# EAGLE board LilyPad-SimplePower-Panel-v20 (EAGLE 6.6.0), part 1 of 2
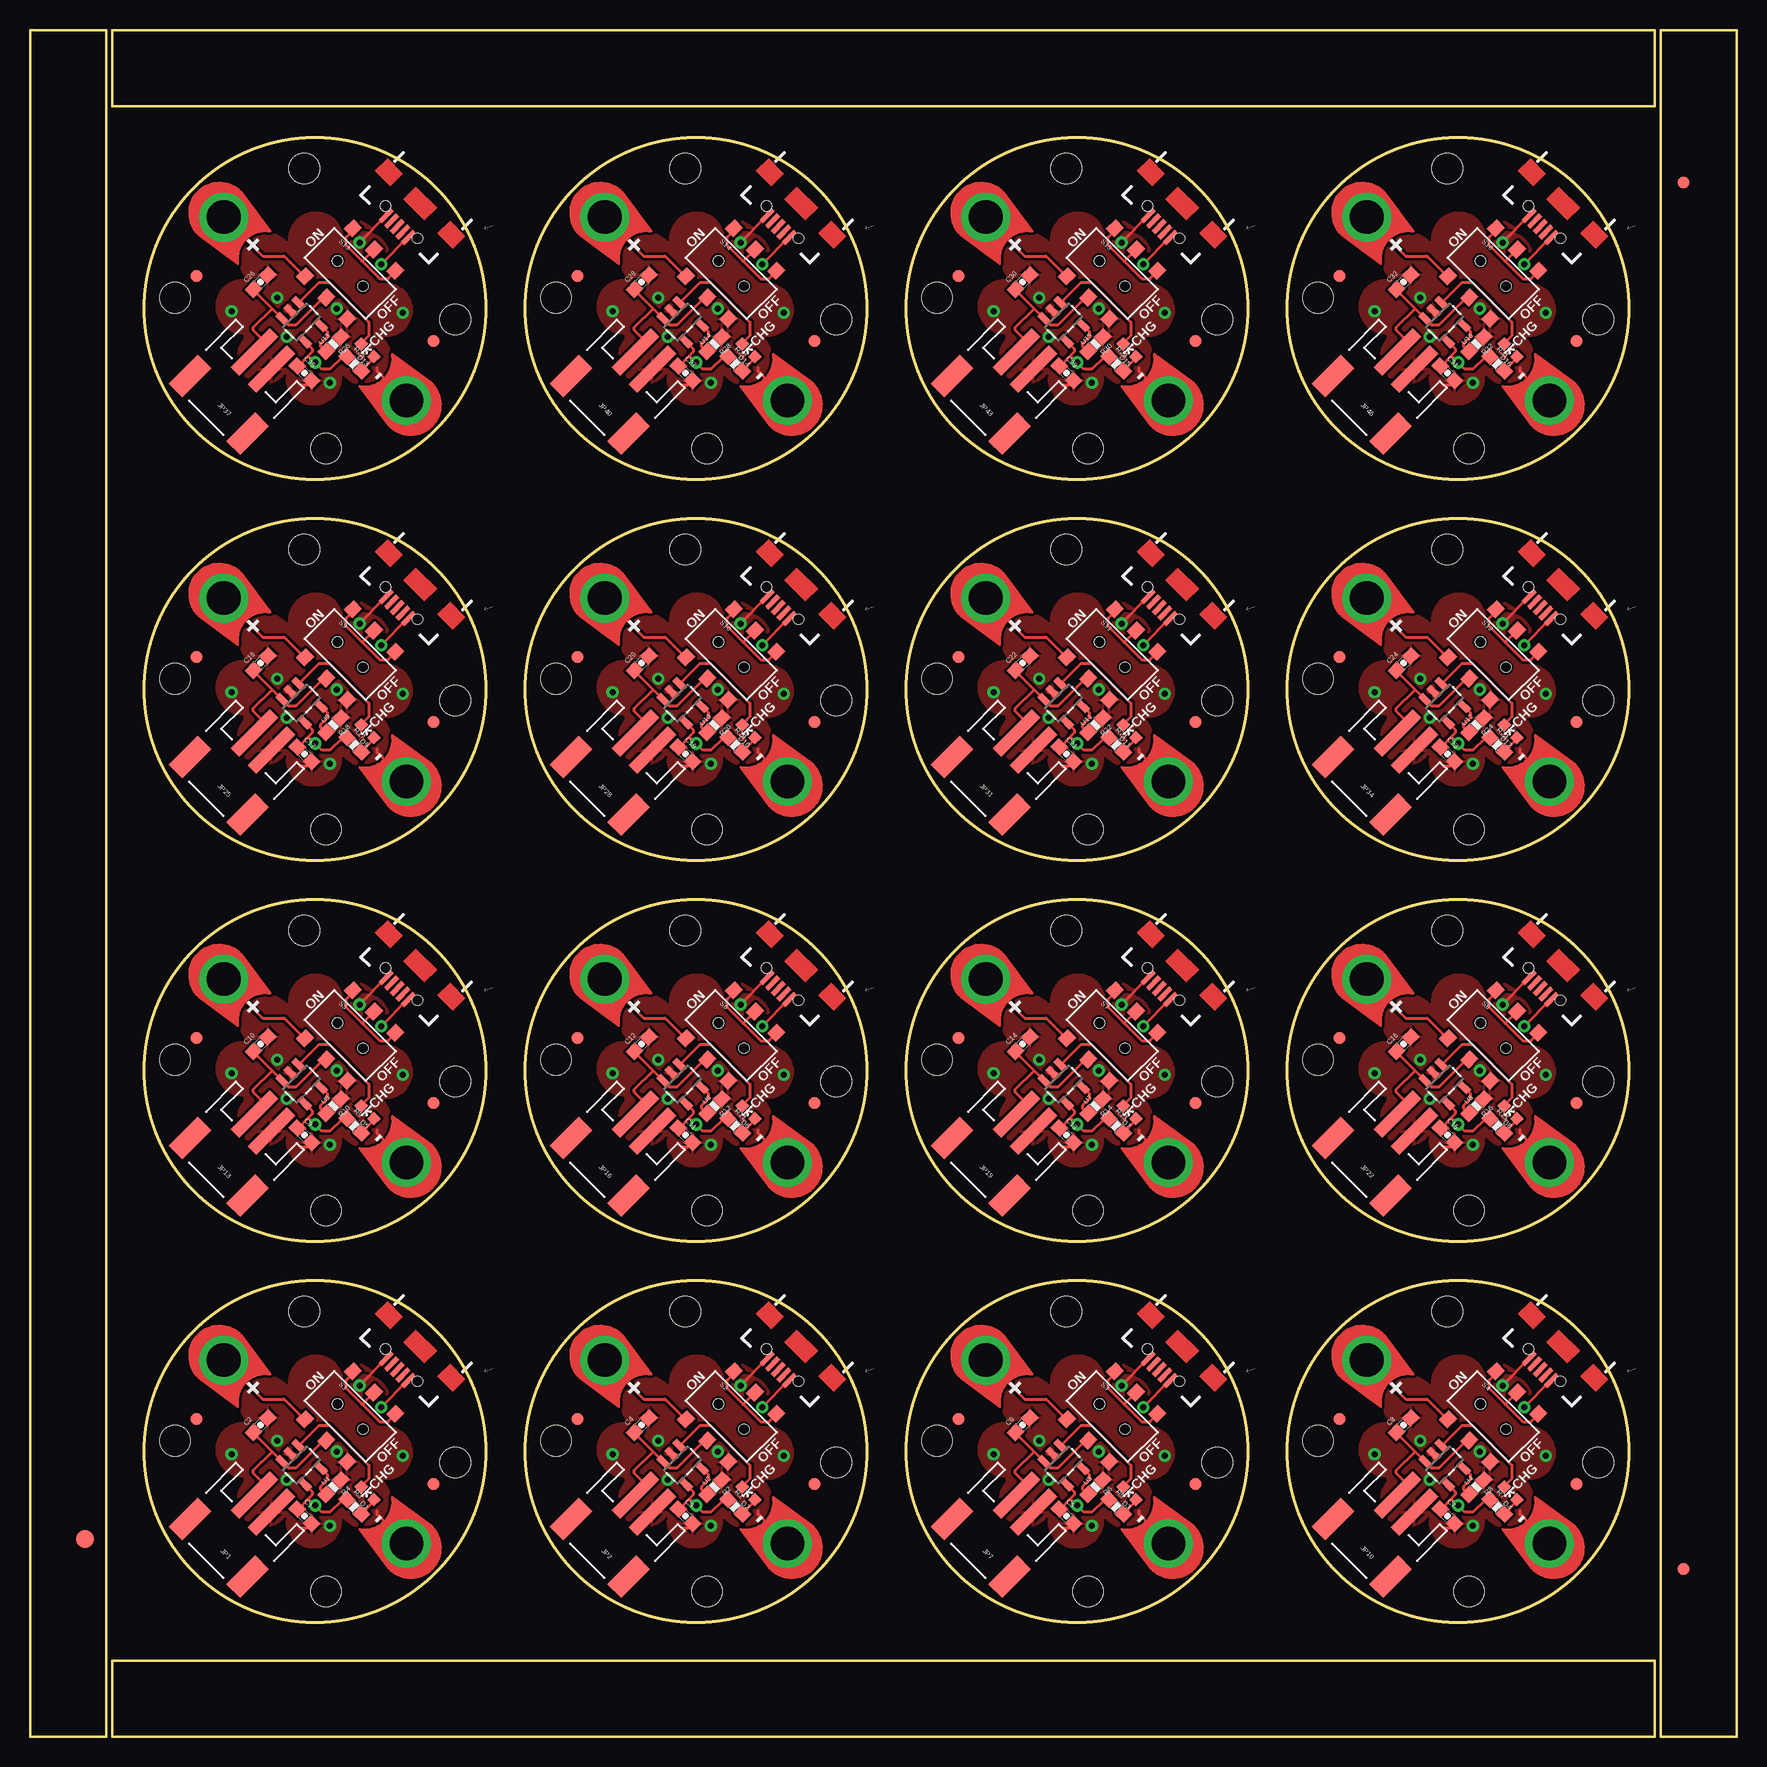
[diagram p0: board, top side]
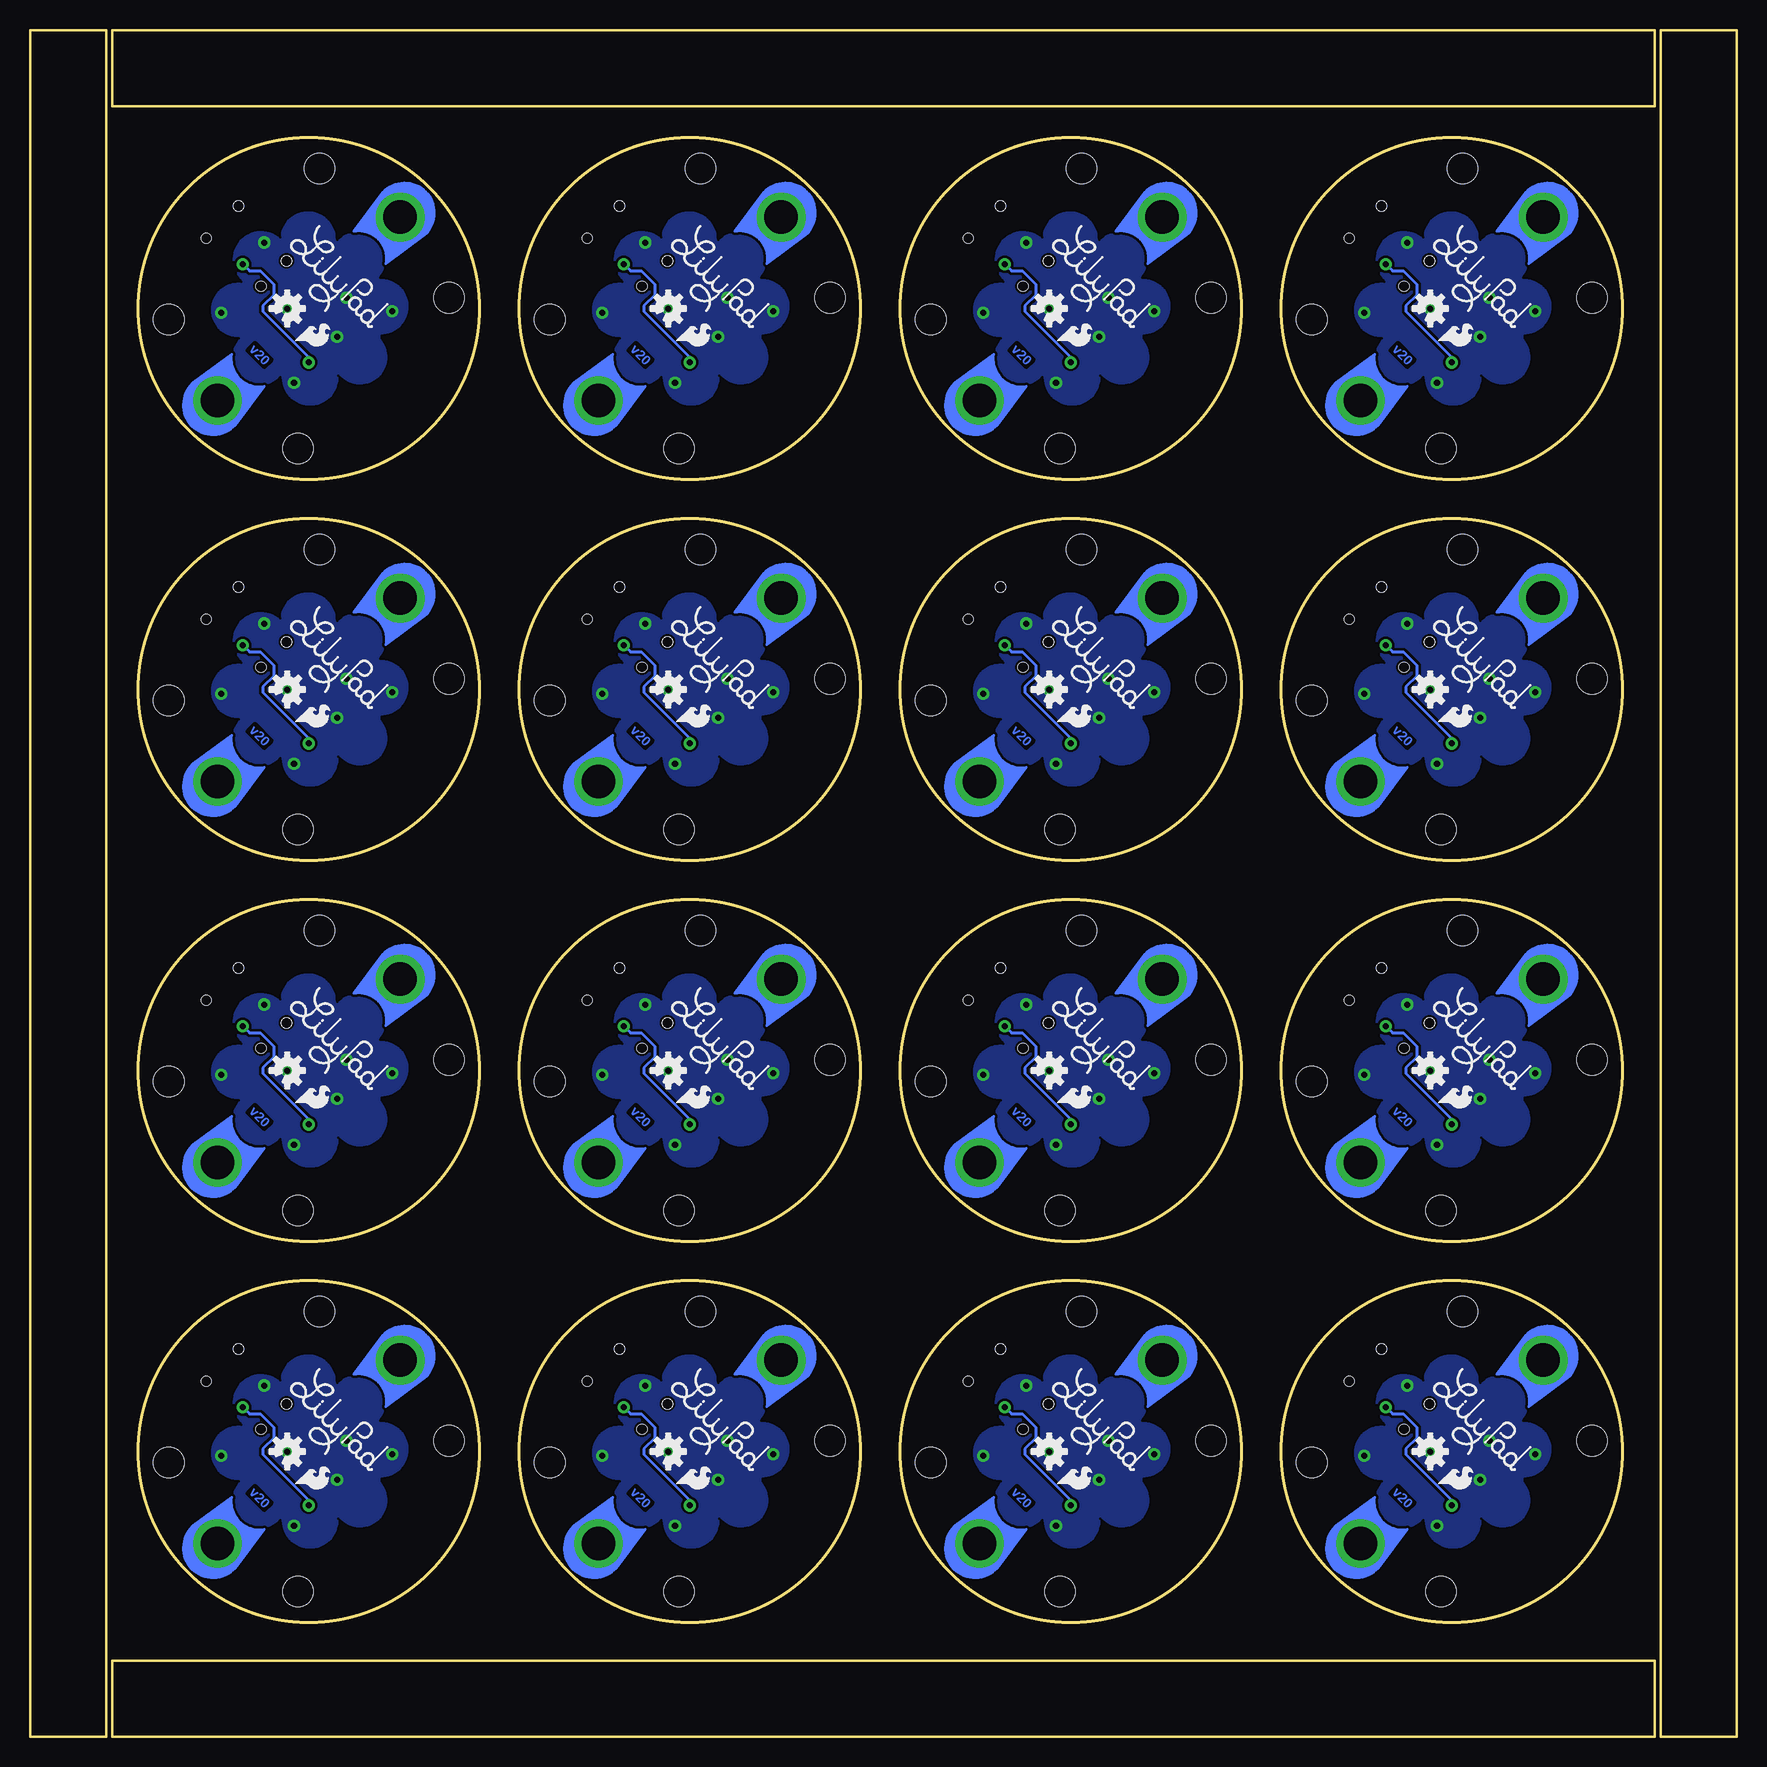
[diagram p1: board, bottom side, seen from below]

Size 142.24 x 142.24 mm. Coordinates in mm from the lower left corner, seen from the top.
Outline: 6.35,0 6.35,142.24 0,142.24 0,0 6.35,0
Outline: 6.86,0 135.38,0 135.38,6.35 6.86,6.35 6.86,0
Outline: 142.24,0 142.24,142.24 135.89,142.24 135.89,0 142.24,0
Outline: 135.38,142.24 6.86,142.24 6.86,135.89 135.38,135.89 135.38,142.24
Outline: circle at 23.76,23.78 radius 14.22
Outline: circle at 55.51,23.78 radius 14.22
Outline: circle at 87.26,23.78 radius 14.22
Outline: circle at 119.01,23.78 radius 14.22
Outline: circle at 23.76,55.53 radius 14.22
Outline: circle at 55.51,55.53 radius 14.22
Outline: circle at 87.26,55.53 radius 14.22
Outline: circle at 119.01,55.53 radius 14.22
Outline: circle at 23.76,87.28 radius 14.22
Outline: circle at 55.51,87.28 radius 14.22
Outline: circle at 87.26,87.28 radius 14.22
Outline: circle at 119.01,87.28 radius 14.22
Outline: circle at 23.76,119.03 radius 14.22
Outline: circle at 55.51,119.03 radius 14.22
Outline: circle at 87.26,119.03 radius 14.22
Outline: circle at 119.01,119.03 radius 14.22
Copper layers (1*16): Top 0.035mm / dielectric 1.5mm / Bottom 0.035mm
Design rules "SparkFun-2-layer": minimum track width 7mil, minimum drill 15mil, track to track 8mil, track to pad 8mil, pad to pad 8mil, via to via 8mil, smd to smd 8mil, copper to edge 8mil, drill to drill 8mil, minimum pad ring 12mil, minimum via ring 10mil, stop-mask expansion 4mil, vias tented up to drill 20mil, thermal gap 10mil
tRestrict: area 12.4,12.4 to 35.1,35.1; area 44.2,12.4 to 66.8,35.1; area 75.9,12.4 to 98.6,35.1; area 107.7,12.4 to 130.3,35.1; area 12.4,44.2 to 35.1,66.9; area 44.2,44.2 to 66.8,66.9; area 75.9,44.2 to 98.6,66.9; area 107.7,44.2 to 130.3,66.9; area 12.4,75.9 to 35.1,98.6; area 44.2,75.9 to 66.8,98.6; area 75.9,75.9 to 98.6,98.6; area 107.7,75.9 to 130.3,98.6; 4 more areas; 128 lines
bRestrict: area 12.4,12.4 to 35.1,35.1; area 44.2,12.4 to 66.8,35.1; area 75.9,12.4 to 98.6,35.1; area 107.7,12.4 to 130.3,35.1; area 12.4,44.2 to 35.1,66.9; area 44.2,44.2 to 66.8,66.9; area 75.9,44.2 to 98.6,66.9; area 107.7,44.2 to 130.3,66.9; area 12.4,75.9 to 35.1,98.6; area 44.2,75.9 to 66.8,98.6; area 75.9,75.9 to 98.6,98.6; area 107.7,75.9 to 130.3,98.6; 4 more areas; 128 lines

## Footprints (pad centres in the part's own frame; a part is rotated, then mirrored left to right if it is on the bottom)
0603-CAP = smd 1.1 x 1: 1 -0.85,0; 2 0.85,0
LED-0603 = smd 0.8 x 0.8: A 0,-0.75; C 0,0.75
FIDUCIAL-1.5X3 = smd 1.5 x 1.5: 1 0,0
FIDUCIAL-1X2 = smd 1 x 1: 1 0,0
JST-2-SMD = smd 1 x 4.6: 1 -1,-3.7; 2 1,-3.7 | smd 1.6 x 3.4: NC1 -3.4,1.5; NC2 3.4,1.5
USB-B-MICRO-SMD_V03 = smd 1.4 x 0.4: D+1 2.7,0; D-1 2.7,0.65; GND1 2.7,-1.3; ID1 2.7,-0.65; VBUS1 2.7,1.3 | hole 0.85: 2.2,1.9; 2.2,-1.9
0603-RES = smd 1.1 x 1: 1 -0.85,0; 2 0.85,0
AYZ0202 = smd 1 x 1.15: 1 -2.5,2.825; 2 0,2.825; 3 2.5,2.825; 4 -2.5,-2.825; 5 0,-2.825; 6 2.5,-2.825 | hole 0.85: 1.5,0; -1.5,0
SEW-HOLE-NO-PAD = hole 2.54: 0,0
SOT23-5 = smd 0.55 x 1.2: 1 -0.95,-1.3; 2 0,-1.3; 3 0.95,-1.3; 4 0.95,1.3; 5 -0.95,1.3
PETAL-LONG-1-2SIDE = drill 2.794 pad 4.064: 1 0.03,0

## Placement (x,y rotation side)
C1  4.7uF  [0603-CAP]  22.86,18.39 315 top
C2  4.7uF  [0603-CAP]  19.22,25.98 45 top
C3  4.7uF  [0603-CAP]  54.61,18.39 315 top
C4  4.7uF  [0603-CAP]  50.97,25.98 45 top
C5  4.7uF  [0603-CAP]  86.36,18.39 315 top
C6  4.7uF  [0603-CAP]  82.72,25.98 45 top
C7  4.7uF  [0603-CAP]  118.11,18.39 315 top
C8  4.7uF  [0603-CAP]  114.47,25.98 45 top
C9  4.7uF  [0603-CAP]  22.86,50.14 315 top
C10  4.7uF  [0603-CAP]  19.22,57.73 45 top
C11  4.7uF  [0603-CAP]  54.61,50.14 315 top
C12  4.7uF  [0603-CAP]  50.97,57.73 45 top
C13  4.7uF  [0603-CAP]  86.36,50.14 315 top
C14  4.7uF  [0603-CAP]  82.72,57.73 45 top
C15  4.7uF  [0603-CAP]  118.11,50.14 315 top
C16  4.7uF  [0603-CAP]  114.47,57.73 45 top
C17  4.7uF  [0603-CAP]  22.86,81.89 315 top
C18  4.7uF  [0603-CAP]  19.22,89.48 45 top
C19  4.7uF  [0603-CAP]  54.61,81.89 315 top
C20  4.7uF  [0603-CAP]  50.97,89.48 45 top
C21  4.7uF  [0603-CAP]  86.36,81.89 315 top
C22  4.7uF  [0603-CAP]  82.72,89.48 45 top
C23  4.7uF  [0603-CAP]  118.11,81.89 315 top
C24  4.7uF  [0603-CAP]  114.47,89.48 45 top
C25  4.7uF  [0603-CAP]  22.86,113.64 315 top
C26  4.7uF  [0603-CAP]  19.22,121.23 45 top
C27  4.7uF  [0603-CAP]  54.61,113.64 315 top
C28  4.7uF  [0603-CAP]  50.97,121.23 45 top
C29  4.7uF  [0603-CAP]  86.36,113.64 315 top
C30  4.7uF  [0603-CAP]  82.72,121.23 45 top
C31  4.7uF  [0603-CAP]  118.11,113.64 315 top
C32  4.7uF  [0603-CAP]  114.47,121.23 45 top
D1  [LED-0603]  28.14,20.3 45 top
D2  [LED-0603]  59.89,20.3 45 top
D3  [LED-0603]  91.64,20.3 45 top
D4  [LED-0603]  123.39,20.3 45 top
D5  [LED-0603]  28.14,52.05 45 top
D6  [LED-0603]  59.89,52.05 45 top
D7  [LED-0603]  91.64,52.05 45 top
D8  [LED-0603]  123.39,52.05 45 top
D9  [LED-0603]  28.14,83.8 45 top
D10  [LED-0603]  59.89,83.8 45 top
D11  [LED-0603]  91.64,83.8 45 top
D12  [LED-0603]  123.39,83.8 45 top
D13  [LED-0603]  28.14,115.55 45 top
D14  [LED-0603]  59.89,115.55 45 top
D15  [LED-0603]  91.64,115.55 45 top
D16  [LED-0603]  123.39,115.55 45 top
E$1  [FIDUCIAL-1.5X3]  4.57,16.51 0 top
E$4  [FIDUCIAL-1X2]  137.79,13.97 0 top
E$5  [FIDUCIAL-1X2]  137.79,129.54 180 top
FID1  FIDUCIAL1X2  [FIDUCIAL-1X2]  13.88,26.47 45 top
FID2  FIDUCIAL1X2  [FIDUCIAL-1X2]  33.64,21.08 45 top
FID3  FIDUCIAL1X2  [FIDUCIAL-1X2]  45.63,26.47 45 top
FID4  FIDUCIAL1X2  [FIDUCIAL-1X2]  65.39,21.08 45 top
FID5  FIDUCIAL1X2  [FIDUCIAL-1X2]  77.38,26.47 45 top
FID6  FIDUCIAL1X2  [FIDUCIAL-1X2]  97.14,21.08 45 top
FID7  FIDUCIAL1X2  [FIDUCIAL-1X2]  109.13,26.47 45 top
FID8  FIDUCIAL1X2  [FIDUCIAL-1X2]  128.89,21.08 45 top
FID9  FIDUCIAL1X2  [FIDUCIAL-1X2]  13.88,58.22 45 top
FID10  FIDUCIAL1X2  [FIDUCIAL-1X2]  33.64,52.83 45 top
FID11  FIDUCIAL1X2  [FIDUCIAL-1X2]  45.63,58.22 45 top
FID12  FIDUCIAL1X2  [FIDUCIAL-1X2]  65.39,52.83 45 top
FID13  FIDUCIAL1X2  [FIDUCIAL-1X2]  77.38,58.22 45 top
FID14  FIDUCIAL1X2  [FIDUCIAL-1X2]  97.14,52.83 45 top
FID15  FIDUCIAL1X2  [FIDUCIAL-1X2]  109.13,58.22 45 top
FID16  FIDUCIAL1X2  [FIDUCIAL-1X2]  128.89,52.83 45 top
FID17  FIDUCIAL1X2  [FIDUCIAL-1X2]  13.88,89.97 45 top
FID18  FIDUCIAL1X2  [FIDUCIAL-1X2]  33.64,84.58 45 top
FID19  FIDUCIAL1X2  [FIDUCIAL-1X2]  45.63,89.97 45 top
FID20  FIDUCIAL1X2  [FIDUCIAL-1X2]  65.39,84.58 45 top
FID21  FIDUCIAL1X2  [FIDUCIAL-1X2]  77.38,89.97 45 top
FID22  FIDUCIAL1X2  [FIDUCIAL-1X2]  97.14,84.58 45 top
FID23  FIDUCIAL1X2  [FIDUCIAL-1X2]  109.13,89.97 45 top
FID24  FIDUCIAL1X2  [FIDUCIAL-1X2]  128.89,84.58 45 top
FID25  FIDUCIAL1X2  [FIDUCIAL-1X2]  13.88,121.72 45 top
FID26  FIDUCIAL1X2  [FIDUCIAL-1X2]  33.64,116.33 45 top
FID27  FIDUCIAL1X2  [FIDUCIAL-1X2]  45.63,121.72 45 top
FID28  FIDUCIAL1X2  [FIDUCIAL-1X2]  65.39,116.33 45 top
FID29  FIDUCIAL1X2  [FIDUCIAL-1X2]  77.38,121.72 45 top
FID30  FIDUCIAL1X2  [FIDUCIAL-1X2]  97.14,116.33 45 top
FID31  FIDUCIAL1X2  [FIDUCIAL-1X2]  109.13,121.72 45 top
FID32  FIDUCIAL1X2  [FIDUCIAL-1X2]  128.89,116.33 45 top
JP1  [JST-2-SMD]  16.8,16.82 135 top
JP2  [JST-2-SMD]  48.55,16.82 135 top
JP3  LOGO-SFESK  [SFE-LOGO-FLAME]  24.88,21.08 315 bottom
JP4  USB_MICROB_PLUGCONN-11752  [USB-B-MICRO-SMD_V03]  32.51,32.53 225 top
JP5  LOGO-SFESK  [SFE-LOGO-FLAME]  56.63,21.08 315 bottom
JP6  USB_MICROB_PLUGCONN-11752  [USB-B-MICRO-SMD_V03]  64.26,32.53 225 top
JP7  [JST-2-SMD]  80.3,16.82 135 top
JP8  LOGO-SFESK  [SFE-LOGO-FLAME]  88.38,21.08 315 bottom
JP9  USB_MICROB_PLUGCONN-11752  [USB-B-MICRO-SMD_V03]  96.01,32.53 225 top
JP10  [JST-2-SMD]  112.05,16.82 135 top
JP11  LOGO-SFESK  [SFE-LOGO-FLAME]  120.13,21.08 315 bottom
JP12  USB_MICROB_PLUGCONN-11752  [USB-B-MICRO-SMD_V03]  127.76,32.53 225 top
JP13  [JST-2-SMD]  16.8,48.57 135 top
JP14  LOGO-SFESK  [SFE-LOGO-FLAME]  24.88,52.83 315 bottom
JP15  USB_MICROB_PLUGCONN-11752  [USB-B-MICRO-SMD_V03]  32.51,64.28 225 top
JP16  [JST-2-SMD]  48.55,48.57 135 top
JP17  LOGO-SFESK  [SFE-LOGO-FLAME]  56.63,52.83 315 bottom
JP18  USB_MICROB_PLUGCONN-11752  [USB-B-MICRO-SMD_V03]  64.26,64.28 225 top
JP19  [JST-2-SMD]  80.3,48.57 135 top
JP20  LOGO-SFESK  [SFE-LOGO-FLAME]  88.38,52.83 315 bottom
JP21  USB_MICROB_PLUGCONN-11752  [USB-B-MICRO-SMD_V03]  96.01,64.28 225 top
JP22  [JST-2-SMD]  112.05,48.57 135 top
JP23  LOGO-SFESK  [SFE-LOGO-FLAME]  120.13,52.83 315 bottom
JP24  USB_MICROB_PLUGCONN-11752  [USB-B-MICRO-SMD_V03]  127.76,64.28 225 top
JP25  [JST-2-SMD]  16.8,80.32 135 top
JP26  LOGO-SFESK  [SFE-LOGO-FLAME]  24.88,84.58 315 bottom
JP27  USB_MICROB_PLUGCONN-11752  [USB-B-MICRO-SMD_V03]  32.51,96.03 225 top
JP28  [JST-2-SMD]  48.55,80.32 135 top
JP29  LOGO-SFESK  [SFE-LOGO-FLAME]  56.63,84.58 315 bottom
JP30  USB_MICROB_PLUGCONN-11752  [USB-B-MICRO-SMD_V03]  64.26,96.03 225 top
JP31  [JST-2-SMD]  80.3,80.32 135 top
JP32  LOGO-SFESK  [SFE-LOGO-FLAME]  88.38,84.58 315 bottom
JP33  USB_MICROB_PLUGCONN-11752  [USB-B-MICRO-SMD_V03]  96.01,96.03 225 top
JP34  [JST-2-SMD]  112.05,80.32 135 top
JP35  LOGO-SFESK  [SFE-LOGO-FLAME]  120.13,84.58 315 bottom
JP36  USB_MICROB_PLUGCONN-11752  [USB-B-MICRO-SMD_V03]  127.76,96.03 225 top
JP37  [JST-2-SMD]  16.8,112.07 135 top
JP38  LOGO-SFESK  [SFE-LOGO-FLAME]  24.88,116.33 315 bottom
JP39  USB_MICROB_PLUGCONN-11752  [USB-B-MICRO-SMD_V03]  32.51,127.78 225 top
JP40  [JST-2-SMD]  48.55,112.07 135 top
JP41  LOGO-SFESK  [SFE-LOGO-FLAME]  56.63,116.33 315 bottom
JP42  USB_MICROB_PLUGCONN-11752  [USB-B-MICRO-SMD_V03]  64.26,127.78 225 top
JP43  [JST-2-SMD]  80.3,112.07 135 top
JP44  LOGO-SFESK  [SFE-LOGO-FLAME]  88.38,116.33 315 bottom
JP45  USB_MICROB_PLUGCONN-11752  [USB-B-MICRO-SMD_V03]  96.01,127.78 225 top
JP46  [JST-2-SMD]  112.05,112.07 135 top
JP47  LOGO-SFESK  [SFE-LOGO-FLAME]  120.13,116.33 315 bottom
JP48  USB_MICROB_PLUGCONN-11752  [USB-B-MICRO-SMD_V03]  127.76,127.78 225 top
R1  330  [0603-RES]  58.76,19.17 315 top
R2  2.0k  [0603-RES]  57.03,20.81 225 top
R3  330  [0603-RES]  27.01,19.17 315 top
R4  2.0k  [0603-RES]  25.28,20.81 225 top
R5  330  [0603-RES]  90.51,19.17 315 top
R6  2.0k  [0603-RES]  88.78,20.81 225 top
R7  330  [0603-RES]  122.26,19.17 315 top
R8  2.0k  [0603-RES]  120.53,20.81 225 top
R9  330  [0603-RES]  27.01,50.92 315 top
R10  2.0k  [0603-RES]  25.28,52.56 225 top
R11  330  [0603-RES]  58.76,50.92 315 top
R12  2.0k  [0603-RES]  57.03,52.56 225 top
R13  330  [0603-RES]  90.51,50.92 315 top
R14  2.0k  [0603-RES]  88.78,52.56 225 top
R15  330  [0603-RES]  122.26,50.92 315 top
R16  2.0k  [0603-RES]  120.53,52.56 225 top
R17  330  [0603-RES]  27.01,82.67 315 top
R18  2.0k  [0603-RES]  25.28,84.31 225 top
R19  330  [0603-RES]  58.76,82.67 315 top
R20  2.0k  [0603-RES]  57.03,84.31 225 top
R21  330  [0603-RES]  90.51,82.67 315 top
R22  2.0k  [0603-RES]  88.78,84.31 225 top
R23  330  [0603-RES]  122.26,82.67 315 top
R24  2.0k  [0603-RES]  120.53,84.31 225 top
R25  330  [0603-RES]  27.01,114.42 315 top
R26  2.0k  [0603-RES]  25.28,116.06 225 top
R27  330  [0603-RES]  58.76,114.42 315 top
R28  2.0k  [0603-RES]  57.03,116.06 225 top
R29  330  [0603-RES]  90.51,114.42 315 top
R30  2.0k  [0603-RES]  88.78,116.06 225 top
R31  330  [0603-RES]  122.26,114.42 315 top
R32  2.0k  [0603-RES]  120.53,116.06 225 top
S1  Power  [AYZ0202]  26.68,26.69 315 top
S2  Power  [AYZ0202]  58.43,26.69 315 top
S3  Power  [AYZ0202]  90.18,26.69 315 top
S4  Power  [AYZ0202]  121.93,26.69 315 top
S5  Power  [AYZ0202]  26.68,58.44 315 top
S6  Power  [AYZ0202]  58.43,58.44 315 top
S7  Power  [AYZ0202]  90.18,58.44 315 top
S8  Power  [AYZ0202]  121.93,58.44 315 top
S9  Power  [AYZ0202]  26.68,90.19 315 top
S10  Power  [AYZ0202]  58.43,90.19 315 top
S11  Power  [AYZ0202]  90.18,90.19 315 top
S12  Power  [AYZ0202]  121.93,90.19 315 top
S13  Power  [AYZ0202]  26.68,121.94 315 top
S14  Power  [AYZ0202]  58.43,121.94 315 top
S15  Power  [AYZ0202]  90.18,121.94 315 top
S16  Power  [AYZ0202]  121.93,121.94 315 top
STANDOFF1  SEW-HOLE-NO-PAD  [SEW-HOLE-NO-PAD]  12.08,24.67 45 top
STANDOFF2  SEW-HOLE-NO-PAD  [SEW-HOLE-NO-PAD]  22.86,35.45 45 top
STANDOFF3  SEW-HOLE-NO-PAD  [SEW-HOLE-NO-PAD]  35.43,22.88 45 top
STANDOFF4  SEW-HOLE-NO-PAD  [SEW-HOLE-NO-PAD]  24.66,12.1 45 top
STANDOFF5  SEW-HOLE-NO-PAD  [SEW-HOLE-NO-PAD]  43.83,24.67 45 top
STANDOFF6  SEW-HOLE-NO-PAD  [SEW-HOLE-NO-PAD]  54.61,35.45 45 top
STANDOFF7  SEW-HOLE-NO-PAD  [SEW-HOLE-NO-PAD]  67.18,22.88 45 top
STANDOFF8  SEW-HOLE-NO-PAD  [SEW-HOLE-NO-PAD]  56.41,12.1 45 top
STANDOFF9  SEW-HOLE-NO-PAD  [SEW-HOLE-NO-PAD]  75.58,24.67 45 top
STANDOFF10  SEW-HOLE-NO-PAD  [SEW-HOLE-NO-PAD]  86.36,35.45 45 top
STANDOFF11  SEW-HOLE-NO-PAD  [SEW-HOLE-NO-PAD]  98.93,22.88 45 top
STANDOFF12  SEW-HOLE-NO-PAD  [SEW-HOLE-NO-PAD]  88.16,12.1 45 top
STANDOFF13  SEW-HOLE-NO-PAD  [SEW-HOLE-NO-PAD]  107.33,24.67 45 top
STANDOFF14  SEW-HOLE-NO-PAD  [SEW-HOLE-NO-PAD]  118.11,35.45 45 top
STANDOFF15  SEW-HOLE-NO-PAD  [SEW-HOLE-NO-PAD]  130.68,22.88 45 top
STANDOFF16  SEW-HOLE-NO-PAD  [SEW-HOLE-NO-PAD]  119.91,12.1 45 top
STANDOFF17  SEW-HOLE-NO-PAD  [SEW-HOLE-NO-PAD]  12.08,56.42 45 top
STANDOFF18  SEW-HOLE-NO-PAD  [SEW-HOLE-NO-PAD]  22.86,67.2 45 top
STANDOFF19  SEW-HOLE-NO-PAD  [SEW-HOLE-NO-PAD]  35.43,54.63 45 top
STANDOFF20  SEW-HOLE-NO-PAD  [SEW-HOLE-NO-PAD]  24.66,43.85 45 top
STANDOFF21  SEW-HOLE-NO-PAD  [SEW-HOLE-NO-PAD]  43.83,56.42 45 top
STANDOFF22  SEW-HOLE-NO-PAD  [SEW-HOLE-NO-PAD]  54.61,67.2 45 top
STANDOFF23  SEW-HOLE-NO-PAD  [SEW-HOLE-NO-PAD]  67.18,54.63 45 top
STANDOFF24  SEW-HOLE-NO-PAD  [SEW-HOLE-NO-PAD]  56.41,43.85 45 top
STANDOFF25  SEW-HOLE-NO-PAD  [SEW-HOLE-NO-PAD]  75.58,56.42 45 top
STANDOFF26  SEW-HOLE-NO-PAD  [SEW-HOLE-NO-PAD]  86.36,67.2 45 top
STANDOFF27  SEW-HOLE-NO-PAD  [SEW-HOLE-NO-PAD]  98.93,54.63 45 top
STANDOFF28  SEW-HOLE-NO-PAD  [SEW-HOLE-NO-PAD]  88.16,43.85 45 top
STANDOFF29  SEW-HOLE-NO-PAD  [SEW-HOLE-NO-PAD]  107.33,56.42 45 top
STANDOFF30  SEW-HOLE-NO-PAD  [SEW-HOLE-NO-PAD]  118.11,67.2 45 top
STANDOFF31  SEW-HOLE-NO-PAD  [SEW-HOLE-NO-PAD]  130.68,54.63 45 top
STANDOFF32  SEW-HOLE-NO-PAD  [SEW-HOLE-NO-PAD]  119.91,43.85 45 top
STANDOFF33  SEW-HOLE-NO-PAD  [SEW-HOLE-NO-PAD]  12.08,88.17 45 top
STANDOFF34  SEW-HOLE-NO-PAD  [SEW-HOLE-NO-PAD]  22.86,98.95 45 top
STANDOFF35  SEW-HOLE-NO-PAD  [SEW-HOLE-NO-PAD]  35.43,86.38 45 top
STANDOFF36  SEW-HOLE-NO-PAD  [SEW-HOLE-NO-PAD]  24.66,75.6 45 top
STANDOFF37  SEW-HOLE-NO-PAD  [SEW-HOLE-NO-PAD]  43.83,88.17 45 top
STANDOFF38  SEW-HOLE-NO-PAD  [SEW-HOLE-NO-PAD]  54.61,98.95 45 top
STANDOFF39  SEW-HOLE-NO-PAD  [SEW-HOLE-NO-PAD]  67.18,86.38 45 top
STANDOFF40  SEW-HOLE-NO-PAD  [SEW-HOLE-NO-PAD]  56.41,75.6 45 top
STANDOFF41  SEW-HOLE-NO-PAD  [SEW-HOLE-NO-PAD]  75.58,88.17 45 top
STANDOFF42  SEW-HOLE-NO-PAD  [SEW-HOLE-NO-PAD]  86.36,98.95 45 top
STANDOFF43  SEW-HOLE-NO-PAD  [SEW-HOLE-NO-PAD]  98.93,86.38 45 top
STANDOFF44  SEW-HOLE-NO-PAD  [SEW-HOLE-NO-PAD]  88.16,75.6 45 top
STANDOFF45  SEW-HOLE-NO-PAD  [SEW-HOLE-NO-PAD]  107.33,88.17 45 top
STANDOFF46  SEW-HOLE-NO-PAD  [SEW-HOLE-NO-PAD]  118.11,98.95 45 top
STANDOFF47  SEW-HOLE-NO-PAD  [SEW-HOLE-NO-PAD]  130.68,86.38 45 top
STANDOFF48  SEW-HOLE-NO-PAD  [SEW-HOLE-NO-PAD]  119.91,75.6 45 top
STANDOFF49  SEW-HOLE-NO-PAD  [SEW-HOLE-NO-PAD]  12.08,119.92 45 top
STANDOFF50  SEW-HOLE-NO-PAD  [SEW-HOLE-NO-PAD]  22.86,130.7 45 top
STANDOFF51  SEW-HOLE-NO-PAD  [SEW-HOLE-NO-PAD]  35.43,118.13 45 top
STANDOFF52  SEW-HOLE-NO-PAD  [SEW-HOLE-NO-PAD]  24.66,107.35 45 top
STANDOFF53  SEW-HOLE-NO-PAD  [SEW-HOLE-NO-PAD]  43.83,119.92 45 top
STANDOFF54  SEW-HOLE-NO-PAD  [SEW-HOLE-NO-PAD]  54.61,130.7 45 top
STANDOFF55  SEW-HOLE-NO-PAD  [SEW-HOLE-NO-PAD]  67.18,118.13 45 top
STANDOFF56  SEW-HOLE-NO-PAD  [SEW-HOLE-NO-PAD]  56.41,107.35 45 top
STANDOFF57  SEW-HOLE-NO-PAD  [SEW-HOLE-NO-PAD]  75.58,119.92 45 top
STANDOFF58  SEW-HOLE-NO-PAD  [SEW-HOLE-NO-PAD]  86.36,130.7 45 top
STANDOFF59  SEW-HOLE-NO-PAD  [SEW-HOLE-NO-PAD]  98.93,118.13 45 top
STANDOFF60  SEW-HOLE-NO-PAD  [SEW-HOLE-NO-PAD]  88.16,107.35 45 top
STANDOFF61  SEW-HOLE-NO-PAD  [SEW-HOLE-NO-PAD]  107.33,119.92 45 top
STANDOFF62  SEW-HOLE-NO-PAD  [SEW-HOLE-NO-PAD]  118.11,130.7 45 top
STANDOFF63  SEW-HOLE-NO-PAD  [SEW-HOLE-NO-PAD]  130.68,118.13 45 top
STANDOFF64  SEW-HOLE-NO-PAD  [SEW-HOLE-NO-PAD]  119.91,107.35 45 top
U1  MCP73831  [SOT23-5]  22.64,22.65 225 top
U2  MCP73831  [SOT23-5]  54.39,22.65 225 top
U3  MCP73831  [SOT23-5]  86.14,22.65 225 top
U4  MCP73831  [SOT23-5]  117.89,22.65 225 top
U5  MCP73831  [SOT23-5]  22.64,54.4 225 top
U6  MCP73831  [SOT23-5]  54.39,54.4 225 top
U7  MCP73831  [SOT23-5]  86.14,54.4 225 top
U8  MCP73831  [SOT23-5]  117.89,54.4 225 top
U9  MCP73831  [SOT23-5]  22.64,86.15 225 top
U10  MCP73831  [SOT23-5]  54.39,86.15 225 top
U11  MCP73831  [SOT23-5]  86.14,86.15 225 top
U12  MCP73831  [SOT23-5]  117.89,86.15 225 top
U13  MCP73831  [SOT23-5]  22.64,117.9 225 top
U14  MCP73831  [SOT23-5]  54.39,117.9 225 top
U15  MCP73831  [SOT23-5]  86.14,117.9 225 top
U16  MCP73831  [SOT23-5]  117.89,117.9 225 top
U$1  LOGO-LPLP  [LOGO-LILYPAD]  21.29,26.25 315 bottom
U$2  SEWTAP9  [PETAL-LONG-1-2SIDE]  63.13,16.09 135 top
U$3  SEWTAP9  [PETAL-LONG-1-2SIDE]  31.38,16.09 135 top
U$4  SEWTAP9  [PETAL-LONG-1-2SIDE]  16.12,31.41 315 top
U$5  OSHW-LOGOS  [OSHW-LOGO-S]  25.55,23.78 315 bottom
U$6  SEWTAP9  [PETAL-LONG-1-2SIDE]  47.87,31.41 315 top
U$7  OSHW-LOGOS  [OSHW-LOGO-S]  57.3,23.78 315 bottom
U$8  LOGO-LPLP  [LOGO-LILYPAD]  53.04,26.25 315 bottom
U$9  SEWTAP9  [PETAL-LONG-1-2SIDE]  94.88,16.09 135 top
U$10  SEWTAP9  [PETAL-LONG-1-2SIDE]  79.62,31.41 315 top
U$11  OSHW-LOGOS  [OSHW-LOGO-S]  89.05,23.78 315 bottom
U$12  LOGO-LPLP  [LOGO-LILYPAD]  84.79,26.25 315 bottom
U$13  SEWTAP9  [PETAL-LONG-1-2SIDE]  126.63,16.09 135 top
U$14  SEWTAP9  [PETAL-LONG-1-2SIDE]  111.37,31.41 315 top
U$15  OSHW-LOGOS  [OSHW-LOGO-S]  120.8,23.78 315 bottom
U$16  LOGO-LPLP  [LOGO-LILYPAD]  116.54,26.25 315 bottom
U$17  SEWTAP9  [PETAL-LONG-1-2SIDE]  31.38,47.84 135 top
U$18  SEWTAP9  [PETAL-LONG-1-2SIDE]  16.12,63.16 315 top
U$19  OSHW-LOGOS  [OSHW-LOGO-S]  25.55,55.53 315 bottom
U$20  LOGO-LPLP  [LOGO-LILYPAD]  21.29,58 315 bottom
U$21  SEWTAP9  [PETAL-LONG-1-2SIDE]  63.13,47.84 135 top
U$22  SEWTAP9  [PETAL-LONG-1-2SIDE]  47.87,63.16 315 top
U$23  OSHW-LOGOS  [OSHW-LOGO-S]  57.3,55.53 315 bottom
U$24  LOGO-LPLP  [LOGO-LILYPAD]  53.04,58 315 bottom
U$25  SEWTAP9  [PETAL-LONG-1-2SIDE]  94.88,47.84 135 top
U$26  SEWTAP9  [PETAL-LONG-1-2SIDE]  79.62,63.16 315 top
U$27  OSHW-LOGOS  [OSHW-LOGO-S]  89.05,55.53 315 bottom
U$28  LOGO-LPLP  [LOGO-LILYPAD]  84.79,58 315 bottom
U$29  SEWTAP9  [PETAL-LONG-1-2SIDE]  126.63,47.84 135 top
U$30  SEWTAP9  [PETAL-LONG-1-2SIDE]  111.37,63.16 315 top
U$31  OSHW-LOGOS  [OSHW-LOGO-S]  120.8,55.53 315 bottom
U$32  LOGO-LPLP  [LOGO-LILYPAD]  116.54,58 315 bottom
U$33  SEWTAP9  [PETAL-LONG-1-2SIDE]  31.38,79.59 135 top
U$34  SEWTAP9  [PETAL-LONG-1-2SIDE]  16.12,94.91 315 top
U$35  OSHW-LOGOS  [OSHW-LOGO-S]  25.55,87.28 315 bottom
U$36  LOGO-LPLP  [LOGO-LILYPAD]  21.29,89.75 315 bottom
U$37  SEWTAP9  [PETAL-LONG-1-2SIDE]  63.13,79.59 135 top
U$38  SEWTAP9  [PETAL-LONG-1-2SIDE]  47.87,94.91 315 top
U$39  OSHW-LOGOS  [OSHW-LOGO-S]  57.3,87.28 315 bottom
U$40  LOGO-LPLP  [LOGO-LILYPAD]  53.04,89.75 315 bottom
U$41  SEWTAP9  [PETAL-LONG-1-2SIDE]  94.88,79.59 135 top
U$42  SEWTAP9  [PETAL-LONG-1-2SIDE]  79.62,94.91 315 top
U$43  OSHW-LOGOS  [OSHW-LOGO-S]  89.05,87.28 315 bottom
U$44  LOGO-LPLP  [LOGO-LILYPAD]  84.79,89.75 315 bottom
U$45  SEWTAP9  [PETAL-LONG-1-2SIDE]  126.63,79.59 135 top
U$46  SEWTAP9  [PETAL-LONG-1-2SIDE]  111.37,94.91 315 top
U$47  OSHW-LOGOS  [OSHW-LOGO-S]  120.8,87.28 315 bottom
U$48  LOGO-LPLP  [LOGO-LILYPAD]  116.54,89.75 315 bottom
U$49  SEWTAP9  [PETAL-LONG-1-2SIDE]  31.38,111.34 135 top
U$50  SEWTAP9  [PETAL-LONG-1-2SIDE]  16.12,126.66 315 top
U$51  OSHW-LOGOS  [OSHW-LOGO-S]  25.55,119.03 315 bottom
U$52  LOGO-LPLP  [LOGO-LILYPAD]  21.29,121.5 315 bottom
U$53  SEWTAP9  [PETAL-LONG-1-2SIDE]  63.13,111.34 135 top
U$54  SEWTAP9  [PETAL-LONG-1-2SIDE]  47.87,126.66 315 top
U$55  OSHW-LOGOS  [OSHW-LOGO-S]  57.3,119.03 315 bottom
U$56  LOGO-LPLP  [LOGO-LILYPAD]  53.04,121.5 315 bottom
U$57  SEWTAP9  [PETAL-LONG-1-2SIDE]  94.88,111.34 135 top
U$58  SEWTAP9  [PETAL-LONG-1-2SIDE]  79.62,126.66 315 top
U$59  OSHW-LOGOS  [OSHW-LOGO-S]  89.05,119.03 315 bottom
U$60  LOGO-LPLP  [LOGO-LILYPAD]  84.79,121.5 315 bottom
U$61  SEWTAP9  [PETAL-LONG-1-2SIDE]  126.63,111.34 135 top
U$62  SEWTAP9  [PETAL-LONG-1-2SIDE]  111.37,126.66 315 top
U$63  OSHW-LOGOS  [OSHW-LOGO-S]  120.8,119.03 315 bottom
U$64  LOGO-LPLP  [LOGO-LILYPAD]  116.54,121.5 315 bottom

## Library data of the parts
C1-C32 = SparkFun-Capacitors; PROD_ID: CAP-08280
D1-D16 = SparkFun-LED; PROD_ID: DIO-09003
E$1 = SparkFun-Retired
E$4 E$5 FID1-FID32 JP3 JP5 JP8 JP11 JP14 JP17 JP20 JP23 JP26 JP29 JP32 JP35 JP38 JP41 JP44 JP47 U$5 U$7 U$11 U$15 U$19 U$23 U$27 U$31 U$35 U$39 U$43 U$47 U$51 U$55 U$59 U$63 = SparkFun-Aesthetics
JP1 JP2 JP7 JP10 JP13 JP16 JP19 JP22 JP25 JP28 JP31 JP34 JP37 JP40 JP43 JP46 S1-S16 = SparkFun
JP4 JP6 JP9 JP12 JP15 JP18 JP21 JP24 JP27 JP30 JP33 JP36 JP39 JP42 JP45 JP48 = SparkFun-Connectors; PROD_ID: CONN-11752
R1 R3 R5 R7 R9 R11 R13 R15 R17 R19 R21 R23 R25 R27 R29 R31 = SparkFun-Resistors; PROD_ID: RES-00818
R2 R4 R6 R8 R10 R12 R14 R16 R18 R20 R22 R24 R26 R28 R30 R32 = SparkFun-Resistors; PROD_ID: RES-08296
STANDOFF1-STANDOFF64 = Local Library
U1-U16 = SparkFun-PowerIC; PROD_ID: IC-09995
U$1-U$4 U$6 U$8-U$10 U$12-U$14 U$16-U$18 U$20-U$22 U$24-U$26 U$28-U$30 U$32-U$34 U$36-U$38 U$40-U$42 U$44-U$46 U$48-U$50 U$52-U$54 U$56-U$58 U$60-U$62 U$64 = LilyPad-Wearables

## Nets
GND: C1.2 C2.2 JP1.1 JP4.GND1 R4.1 S1.6 U1.2 U$3.1
GND1: C3.2 C4.2 JP2.1 JP6.GND1 R2.1 S2.6 U2.2 U$2.1
GND2: C5.2 C6.2 JP7.1 JP9.GND1 R6.1 S3.6 U3.2 U$9.1
GND3: C7.2 C8.2 JP10.1 JP12.GND1 R8.1 S4.6 U4.2 U$13.1
GND4: C9.2 C10.2 JP13.1 JP15.GND1 R10.1 S5.6 U5.2 U$17.1
GND5: C11.2 C12.2 JP16.1 JP18.GND1 R12.1 S6.6 U6.2 U$21.1
GND6: C13.2 C14.2 JP19.1 JP21.GND1 R14.1 S7.6 U7.2 U$25.1
GND7: C15.2 C16.2 JP22.1 JP24.GND1 R16.1 S8.6 U8.2 U$29.1
GND8: C17.2 C18.2 JP25.1 JP27.GND1 R18.1 S9.6 U9.2 U$33.1
GND9: C19.2 C20.2 JP28.1 JP30.GND1 R20.1 S10.6 U10.2 U$37.1
GND10: C21.2 C22.2 JP31.1 JP33.GND1 R22.1 S11.6 U11.2 U$41.1
GND11: C23.2 C24.2 JP34.1 JP36.GND1 R24.1 S12.6 U12.2 U$45.1
GND12: C25.2 C26.2 JP37.1 JP39.GND1 R26.1 S13.6 U13.2 U$49.1
GND13: C27.2 C28.2 JP40.1 JP42.GND1 R28.1 S14.6 U14.2 U$53.1
GND14: C29.2 C30.2 JP43.1 JP45.GND1 R30.1 S15.6 U15.2 U$57.1
GND15: C31.2 C32.2 JP46.1 JP48.GND1 R32.1 S16.6 U16.2 U$61.1
N$1: C2.1 JP1.2 S1.5 U1.3
N$2: C4.1 JP2.2 S2.5 U2.3
N$3: C1.1 JP4.VBUS1 R3.1 U1.4
N$4: D1.C U1.1
N$5: D1.A R3.2
N$6: S1.4 U$4.1
N$7: R4.2 U1.5
N$8: C3.1 JP6.VBUS1 R1.1 U2.4
N$9: D2.C U2.1
N$10: D2.A R1.2
N$11: R2.2 U2.5
N$12: S2.4 U$6.1
N$13: C6.1 JP7.2 S3.5 U3.3
N$14: C5.1 JP9.VBUS1 R5.1 U3.4
N$15: D3.C U3.1
N$16: D3.A R5.2
N$17: R6.2 U3.5
N$18: S3.4 U$10.1
N$19: C8.1 JP10.2 S4.5 U4.3
N$20: C7.1 JP12.VBUS1 R7.1 U4.4
N$21: D4.C U4.1
N$22: D4.A R7.2
N$23: R8.2 U4.5
N$24: S4.4 U$14.1
N$25: C10.1 JP13.2 S5.5 U5.3
N$26: C9.1 JP15.VBUS1 R9.1 U5.4
N$27: D5.C U5.1
N$28: D5.A R9.2
N$29: R10.2 U5.5
N$30: S5.4 U$18.1
N$31: C12.1 JP16.2 S6.5 U6.3
N$32: C11.1 JP18.VBUS1 R11.1 U6.4
N$33: D6.C U6.1
N$34: D6.A R11.2
N$35: R12.2 U6.5
N$36: S6.4 U$22.1
N$37: C14.1 JP19.2 S7.5 U7.3
N$38: C13.1 JP21.VBUS1 R13.1 U7.4
N$39: D7.C U7.1
N$40: D7.A R13.2
N$41: R14.2 U7.5
N$42: S7.4 U$26.1
N$43: C16.1 JP22.2 S8.5 U8.3
N$44: C15.1 JP24.VBUS1 R15.1 U8.4
N$45: D8.C U8.1
N$46: D8.A R15.2
N$47: R16.2 U8.5
N$48: S8.4 U$30.1
N$49: C18.1 JP25.2 S9.5 U9.3
N$50: C17.1 JP27.VBUS1 R17.1 U9.4
N$51: D9.C U9.1
N$52: D9.A R17.2
N$53: R18.2 U9.5
N$54: S9.4 U$34.1
N$55: C20.1 JP28.2 S10.5 U10.3
N$56: C19.1 JP30.VBUS1 R19.1 U10.4
N$57: D10.C U10.1
N$58: D10.A R19.2
N$59: R20.2 U10.5
N$60: S10.4 U$38.1
N$61: C22.1 JP31.2 S11.5 U11.3
N$62: C21.1 JP33.VBUS1 R21.1 U11.4
N$63: D11.C U11.1
N$64: D11.A R21.2
N$65: R22.2 U11.5
N$66: S11.4 U$42.1
N$67: C24.1 JP34.2 S12.5 U12.3
N$68: C23.1 JP36.VBUS1 R23.1 U12.4
N$69: D12.C U12.1
N$70: D12.A R23.2
N$71: R24.2 U12.5
N$72: S12.4 U$46.1
N$73: C26.1 JP37.2 S13.5 U13.3
N$74: C25.1 JP39.VBUS1 R25.1 U13.4
N$75: D13.C U13.1
N$76: D13.A R25.2
N$77: R26.2 U13.5
N$78: S13.4 U$50.1
N$79: C28.1 JP40.2 S14.5 U14.3
N$80: C27.1 JP42.VBUS1 R27.1 U14.4
N$81: D14.C U14.1
N$82: D14.A R27.2
N$83: R28.2 U14.5
N$84: S14.4 U$54.1
N$85: C30.1 JP43.2 S15.5 U15.3
N$86: C29.1 JP45.VBUS1 R29.1 U15.4
N$87: D15.C U15.1
N$88: D15.A R29.2
N$89: R30.2 U15.5
N$90: S15.4 U$58.1
N$91: C32.1 JP46.2 S16.5 U16.3
N$92: C31.1 JP48.VBUS1 R31.1 U16.4
N$93: D16.C U16.1
N$94: D16.A R31.2
N$95: R32.2 U16.5
N$96: S16.4 U$62.1
SINK1: S1.1 S1.2 S1.3
SINK2: S2.1 S2.2 S2.3
SINK3: S3.1 S3.2 S3.3
SINK4: S4.1 S4.2 S4.3
SINK5: S5.1 S5.2 S5.3
SINK6: S6.1 S6.2 S6.3
SINK7: S7.1 S7.2 S7.3
SINK8: S8.1 S8.2 S8.3
SINK9: S9.1 S9.2 S9.3
SINK10: S10.1 S10.2 S10.3
SINK11: S11.1 S11.2 S11.3
SINK12: S12.1 S12.2 S12.3
SINK13: S13.1 S13.2 S13.3
SINK14: S14.1 S14.2 S14.3
SINK15: S15.1 S15.2 S15.3
SINK16: S16.1 S16.2 S16.3